# EAGLE board 2x2_DPad (EAGLE 8.5.1)
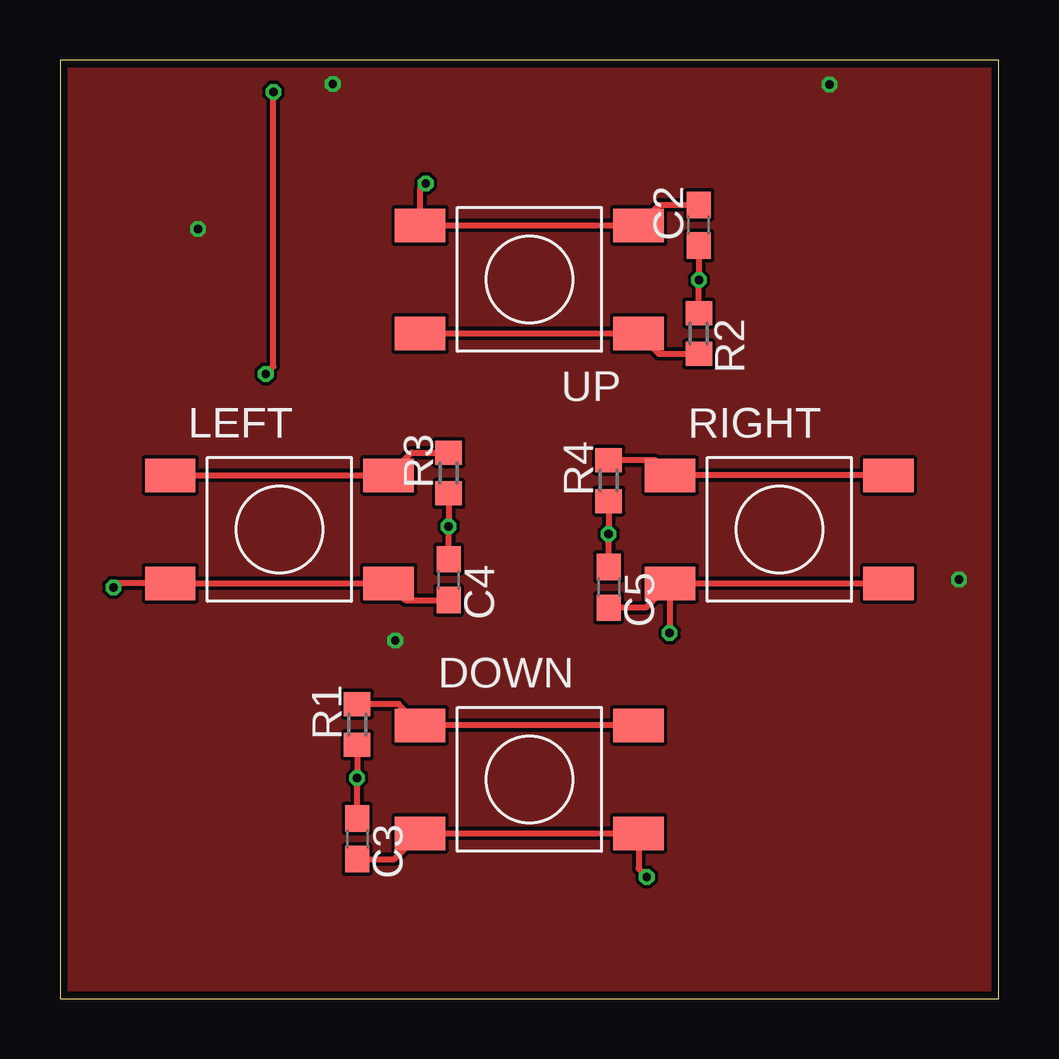
[diagram p0: board, top side]
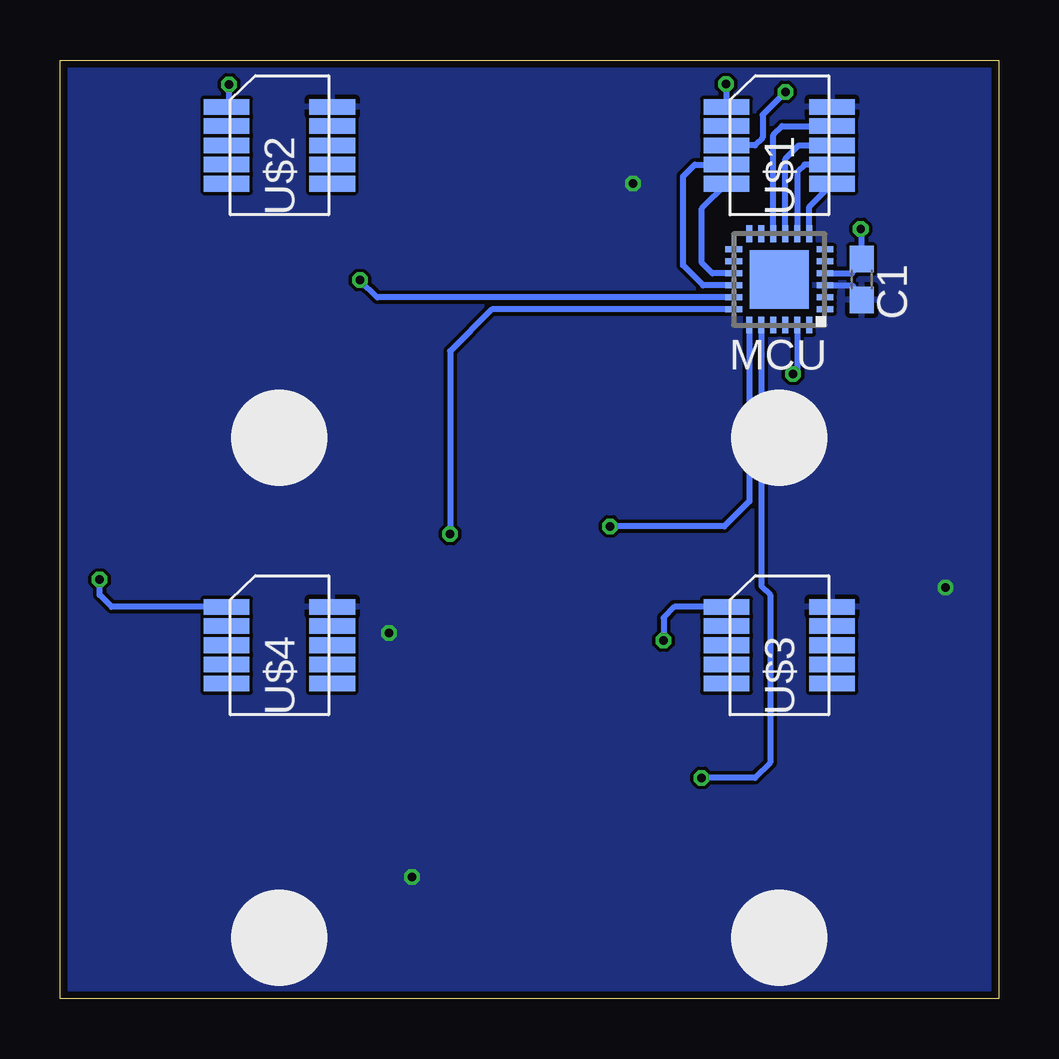
[diagram p1: board, bottom side, seen from below]

Size 39.12 x 39.12 mm. Coordinates in mm from the lower left corner, seen from the top.
Outline: 0,0 39.12,0 39.12,39.12 0,39.12 0,0
Copper layers (1*16): Top 0.035mm / dielectric 1.5mm / Bottom 0.035mm
Design rules "PCB-POOL Standard": minimum track width 0.15mm, minimum drill 0.3mm, track to track 0.15mm, track to pad 0.15mm, pad to pad 0.15mm, via to via 0.15mm, smd to smd 0.15mm, copper to edge 0.3mm, drill to drill 0.2mm, minimum pad ring 0.2mm, minimum via ring 0.15mm, stop-mask expansion 0.075mm, vias tented up to drill 0mil, thermal gap 0.2mm

## Footprints (pad centres in the part's own frame; a part is rotated, then mirrored left to right if it is on the bottom)
C0603 = smd 1.1 x 1: 1 -0.85,0; 2 0.85,0
TASTER = smd 2.1 x 1.4: A0 -4.55,2.25; A1 4.55,2.25; B0 -4.55,-2.25; B1 4.55,-2.25
QFN24-4X4 = smd 0.7 x 0.25: 1 -1.9,1.25; 2 -1.9,0.75; 3 -1.9,0.25; 4 -1.9,-0.25; 5 -1.9,-0.75; 6 -1.9,-1.25; 13 1.9,-1.25; 14 1.9,-0.75; 15 1.9,-0.25; 16 1.9,0.25; 17 1.9,0.75; 18 1.9,1.25 | smd 0.25 x 0.7: 7 -1.25,-1.9; 8 -0.75,-1.9; 9 -0.25,-1.9; 10 0.25,-1.9; 11 0.75,-1.9; 12 1.25,-1.9; 19 1.25,1.9; 20 0.75,1.9; 21 0.25,1.9; 22 -0.25,1.9; 23 -0.75,1.9; 24 -1.25,1.9 | smd 2.45 x 2.45: EXP 0,0
R0603 = smd 1 x 1.1: 1 -0.85,0; 2 0.85,0
53307-1071 = smd 0.65 x 1.9: P$1 1.6,2.2; P$2 0.8,2.2; P$3 0,2.2; P$4 -0.8,2.2; P$5 -1.6,2.2; P$6 -1.6,-2.2; P$7 -0.8,-2.2; P$8 0,-2.2; P$9 0.8,-2.2; P$10 1.6,-2.2

## Placement (x,y rotation side)
C1  100nF  [C0603]  5.71,29.97 270 bottom
C2  20nF  [C0603]  26.62,32.23 90 top
C3  20nF  [C0603]  12.38,6.67 270 top
C4  20nF  [C0603]  16.19,17.46 270 top
C5  20nF  [C0603]  22.86,17.14 270 top
DOWN  TASTER  [TASTER]  19.56,9.14 0 top
LEFT  TASTER  [TASTER]  9.14,19.56 0 top
MCU  ATTINY1614/16/17  [QFN24-4X4]  9.14,29.97 180 bottom
R1  1k  [R0603]  12.38,11.43 90 top
R2  1k  [R0603]  26.62,27.72 270 top
R3  1k  [R0603]  16.19,21.91 90 top
R4  1k  [R0603]  22.86,21.59 90 top
RIGHT  TASTER  [TASTER]  29.97,19.56 0 top
U$1  MOLEX-STACKINGHEADER  [53307-1071]  9.14,35.56 90 bottom
U$2  MOLEX-STACKINGHEADER  [53307-1071]  29.97,35.56 90 bottom
U$3  MOLEX-STACKINGHEADER  [53307-1071]  9.14,14.73 90 bottom
U$4  MOLEX-STACKINGHEADER  [53307-1071]  29.97,14.73 90 bottom
UP  TASTER  [TASTER]  19.56,29.97 180 top

## Library data of the parts
C1-C5 = rcl; SPICEPREFIX: C
DOWN LEFT RIGHT UP = button
MCU = ATTINY161x
R1-R4 = rcl; SPICEPREFIX: R
U$1-U$4 = Molex-53307-1071

## Nets
+5V: C1.1 MCU.4 U$1.P$1 U$2.P$1 U$3.P$1 U$4.P$1
ADD0: MCU.7 U$1.P$6
ADD1: MCU.8 U$1.P$7
ADD2: MCU.9 U$1.P$8
ADD3: MCU.10 U$1.P$9
DOWN: C3.1 MCU.20 R1.1
GND: C1.2 C2.2 C3.2 C4.2 C5.2 DOWN.B0 DOWN.B1 LEFT.B0 LEFT.B1 MCU.3 RIGHT.B0 RIGHT.B1 U$1.P$10 U$2.P$10 U$3.P$10 U$4.P$10 UP.B0 UP.B1
LEFT: C4.1 MCU.19 R3.1
N$1: DOWN.A0 DOWN.A1 R1.2
N$2: LEFT.A0 LEFT.A1 R3.2
N$3: R2.2 UP.A0 UP.A1
N$4: R4.2 RIGHT.A0 RIGHT.A1
RIGHT: C5.1 MCU.18 R4.1
SCL: MCU.16 U$1.P$4
SDA: MCU.15 U$1.P$5
UP: C2.1 MCU.17 R2.1
UPDI: MCU.23 U$1.P$3

## Tracks (layer width: path | path; a pad name or v marks a point on that pad's centre or on a via)
+5V  (via drill 0.35)
  Bottom 0.254: MCU.4 6.12,30.22 C1.1 5.71,32.04 v5.75,32.08 | U$1.P$1 11.34,38.09 v11.37,38.11 | U$2.P$1 32.07,37.26 v32.07,38.1 | U$4.P$1 36.97,16.33 37.47,16.83 v37.47,17.46 | U$3.P$1 13.51,16.33 13.97,15.88 v13.97,14.92
  pour Top: -1.27,42.42 41.91,42.42 41.91,-2.54 -1.27,-2.54
ADD0
  Bottom 0.254: MCU.7 7.89,33.01 U$1.P$6
ADD1
  Bottom 0.254: U$1.P$7 8.09,34.76 8.39,34.46 MCU.8
ADD2
  Bottom 0.254: MCU.9 8.89,35 8.33,35.56 U$1.P$8
ADD3
  Bottom 0.254: U$1.P$9 9.03,36.36 9.39,36 MCU.10
DOWN  (via drill 0.35)
  Top 0.254: R1.1 v12.38,9.21 C3.1
  Bottom 0.254: MCU.20 9.89,17.2 9.53,16.83 9.53,9.84 10.16,9.21 v12.38,9.21
GND  (via drill 0.35)
  Top 0.254: C2.2 24.97,33.08 UP.B0 UP.B1 15.01,33.74 v15.24,33.97 | RIGHT.B0 RIGHT.B1 | RIGHT.B0 24.41,16.3 C5.2 | C3.2 13.93,5.82 DOWN.B0 DOWN.B1 24.11,5.42 v24.45,5.08 | C4.2 14.39,16.61 LEFT.B1 LEFT.B0 2.38,17.31 v2.22,17.14 | RIGHT.B0 25.4,17.29 v25.4,15.24
  Bottom 0.254: MCU.3 6.12,29.72 C1.2
  pour Bottom: -2.54,41.15 40.64,41.15 40.64,-1.27 -2.54,-1.27
LEFT  (via drill 0.35)
  Top 0.254: C4.1 v16.19,19.68 R3.1
  Bottom 0.254: MCU.19 10.39,20.72 11.43,19.68 v16.19,19.68
N$1
  Top 0.254: DOWN.A1 DOWN.A0 14.12,12.28 R1.2
N$2
  Top 0.254: LEFT.A0 LEFT.A1 14.64,22.76 R3.2
N$3
  Top 0.254: R2.2 24.96,26.87 UP.A0 UP.A1
N$4
  Top 0.254: RIGHT.A1 RIGHT.A0 24.79,22.44 R4.2
RIGHT  (via drill 0.35)
  Top 0.254: C5.1 v22.86,19.37 R4.1
  Bottom 0.254: MCU.18 21.12,28.72 22.86,26.99 v22.86,19.37
SCL
  Bottom 0.254: MCU.16 12.32,29.72 13.16,30.56 13.16,34.27 12.66,34.76 U$1.P$4
SDA
  Bottom 0.254: MCU.15 11.93,30.22 12.37,30.66 12.37,32.93 U$1.P$5
UP  (via drill 0.35)
  Top 0.254: R2.1 v26.62,29.95 C2.1
  Bottom 0.254: MCU.17 25.89,29.22 v26.62,29.95
UPDI  (via drill 0.35)
  Top 0.254: v8.57,26.04 8.89,26.35 v8.89,37.78
  Bottom 0.254: MCU.23 8.39,26.21 v8.57,26.04 | v8.89,37.78 9.84,36.83 9.84,35.88 10.16,35.56 U$1.P$3